# EAGLE board board (EAGLE 9.7.0)
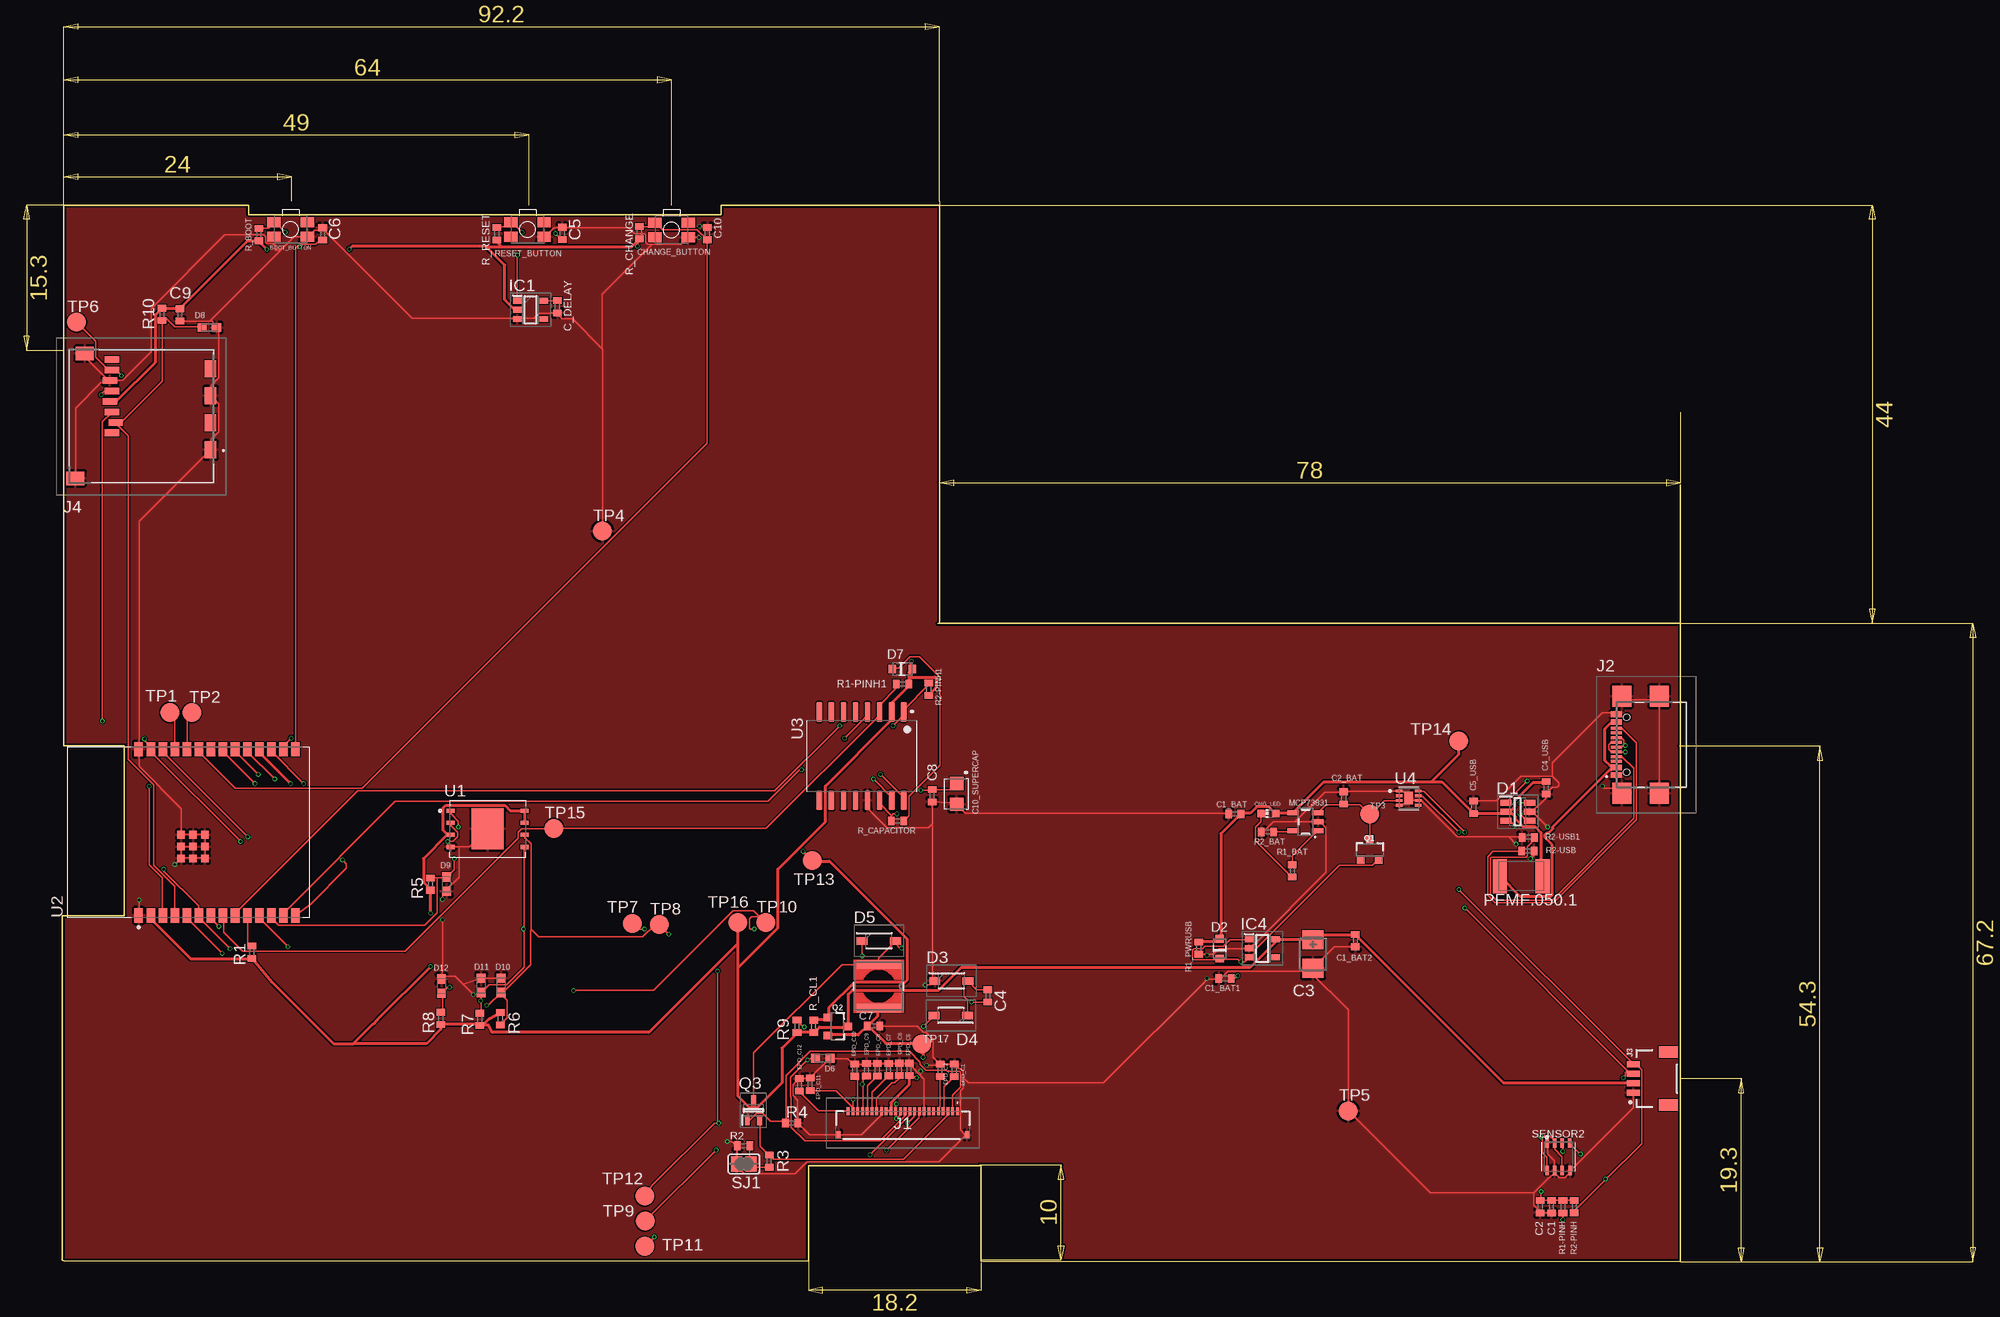
[diagram p0: board, top side]
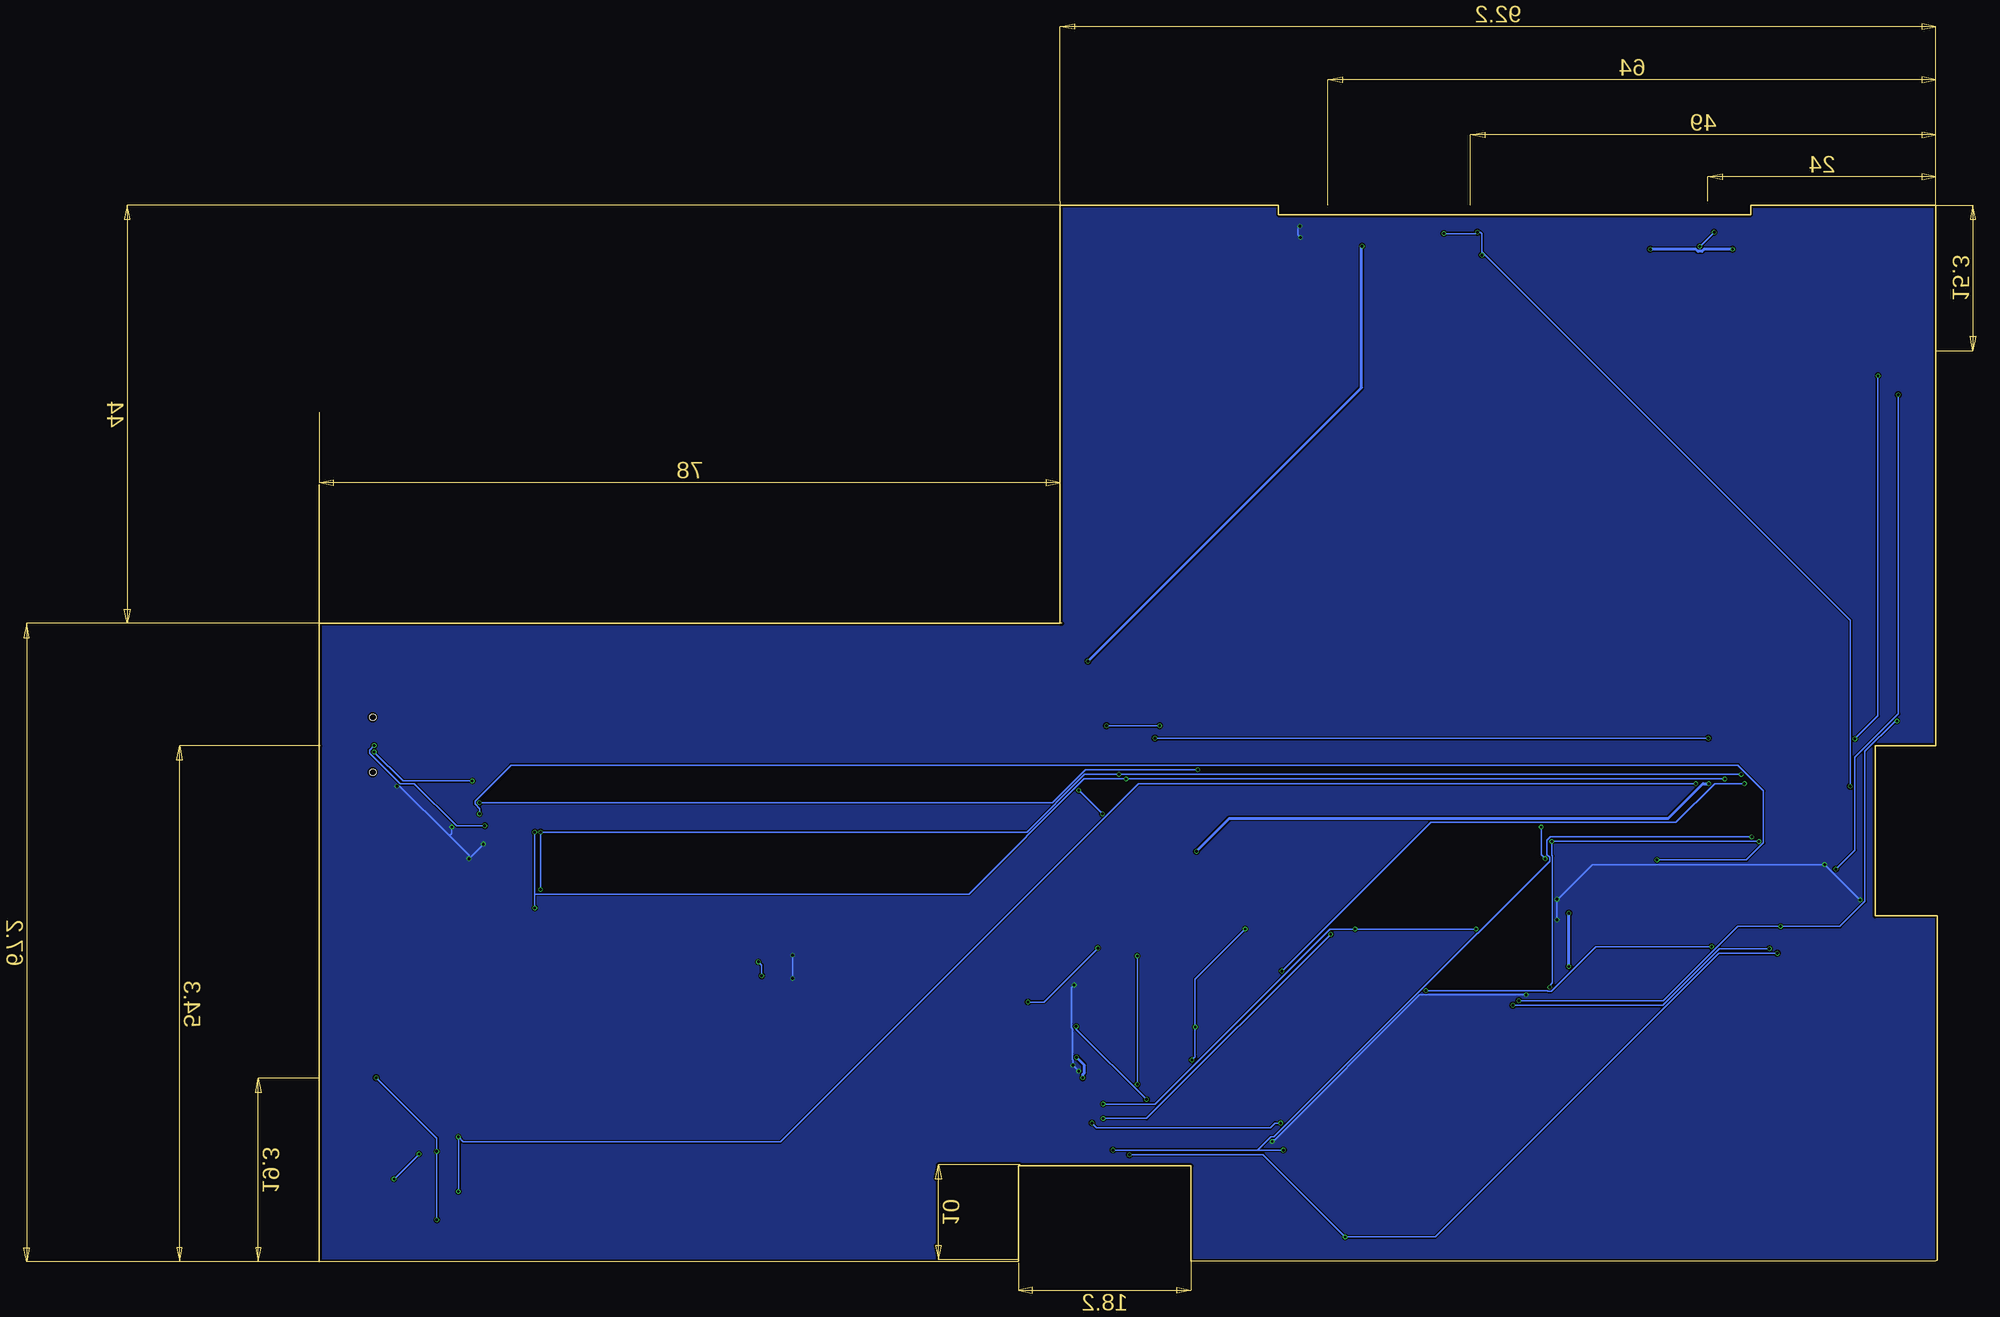
[diagram p1: board, bottom side, seen from below]

Size 170.34 x 111.2 mm. Coordinates in mm from the lower left corner, seen from the top.
Outline: 170.34,81.8 170.34,67.2
Outline: 170.34,67.2 92.34,67.2 92.34,111.2 69.34,111.2 69.34,110.2 19.64,110.2 19.64,111.2 0.14,111.2 0.14,54.3 6.54,54.3 6.54,36.4 0,36.4 0,0.14 0.14,0.1 78.55,0.05 78.55,10.1 96.74,10.1 96.74,0.04 170.34,0 170.34,67.2
Copper layers (1*16): Top 0.035mm / dielectric 1.6mm / Bottom 0.035mm
Design rules "jlcpcb-2layers.dru *": minimum track width 0.15mm, minimum drill 0.3mm, track to track 5mil, track to pad 5mil, pad to pad 5mil, via to via 5mil, smd to smd 5mil, copper to edge 0.2mm, drill to drill 6mil, minimum pad ring 10mil, minimum via ring 3mil, stop-mask expansion 4mil, vias tented up to drill 0mil, thermal gap 10mil
Net classes: 1 new_netclass: width 0.3 mm

## Footprints (pad centres in the part's own frame; a part is rotated, then mirrored left to right if it is on the bottom)
MYBUTTON = smd 1.4 x 1.05: 1 1.75,0.75; 2 -1.75,0.75; 3 -1.75,-0.75; 4 1.75,-0.75
EAGLE-LTSPICE_C0402 = smd 0.7 x 0.9: 1 -0.65,0; 2 0.65,0
ESP32_WROVER_EAGLE-LTSPICE_C0402 = smd 0.7 x 0.9: 1 -0.65,0; 2 0.65,0
RCL_CT3528 = smd 2 x 2.2: + -1.5,0; - 1.5,0
CAPCP3225X100N = smd 1.4 x 1.4: 1 -1.1,0; 2 1.1,0
ADAFRUIT_CHIP-LED0603 = smd 0.8 x 0.8: A 0,-0.75; C 0,0.75
SOT95P280X145-6N = smd 1.2 x 0.6: 1 -1.25,0.95; 2 -1.25,0; 3 -1.25,-0.95; 4 1.25,-0.95; 5 1.25,0; 6 1.25,0.95
ESP32_WROVER_AVX---SD0805S020S1R0_AVX_SD0805S020S1R0_0 = smd 0.8 x 0.9: 1 -1.05,0; 2 1.05,0
SOD3716X135N = smd 1.15 x 0.8: 1 -1.75,0; 2 1.75,0
DIOC1608X36N = smd 0.97 x 0.94: 1 -0.75,0; 2 0.75,0
SOT95P280X125-5N = smd 0.9 x 0.6: 1 -1.4,0.95; 2 -1.4,0; 3 -1.4,-0.95; 4 1.4,-0.95; 5 1.4,0.95
SOT95P280X120-5N = smd 0.9 x 0.6: 1 -1.4,0.95; 2 -1.4,0; 3 -1.4,-0.95; 4 1.4,-0.95; 5 1.4,0.95
FH34SRJ24S05SH99 = smd 0.3 x 0.8: 1 5.75,1.45; 2 5.25,1.45; 3 4.75,1.45; 4 4.25,1.45; 5 3.75,1.45; 6 3.25,1.45; 7 2.75,1.45; 8 2.25,1.45; 9 1.75,1.45; 10 1.25,1.45; 11 0.75,1.45; 12 0.25,1.45; 13 -0.25,1.45; 14 -0.75,1.45; 15 -1.25,1.45; 16 -1.75,1.45; 17 -2.25,1.45; 18 -2.75,1.45; 19 -3.25,1.45; 20 -3.75,1.45; 21 -4.25,1.45; 22 -4.75,1.45; 23 -5.25,1.45; 24 -5.75,1.45 | smd 0.4 x 0.8: MP1 6.75,-1.05; MP2 -6.75,-1.05
SAMACSYS_PARTS_USB4110GFA = smd 0.3 x 1.15: A1 -3.35,3.678; A4 -2.55,3.678; A5 -1.25,3.678; A6 -0.25,3.678; A7 0.25,3.678; A8 1.25,3.678; A9 2.55,3.678; A12 3.35,3.678; B1 3.05,3.678; B4 2.25,3.678; B5 1.75,3.678; B6 0.75,3.678; B7 -0.75,3.678; B8 -1.75,3.678; B9 -2.25,3.678; B12 -3.05,3.678 | smd 2.18 x 2: MP1 -5.11,-0.827; MP2 5.11,-0.827; MP3 -5.11,3.103; MP4 5.11,3.103 | hole 0.65: -2.89,2.603; 2.89,2.603
JST04_1MM_RA = smd 0.6 x 1.35: 1 -1.5,0; 2 -0.5,0; 3 0.5,0; 4 1.5,0 | smd 1.2 x 2: NC1 2.8,-3.675; NC2 -2.8,-3.675
112ATAARR03ATTEND = smd 1.8 x 1.2: G1 10.6,10.4; G2 4.9,10.4; S1 7.75,10.4; S2 2.05,10.4 | smd 1.4 x 1.9: G3 13.6,-3.85; G4 0.45,-2.85 | smd 0.7 x 1.5: P1 8.8,0; P2 7.7,0.4; P3 6.6,0; P4 5.5,-0.2; P5 4.4,0; P6 3.3,-0.2; P7 2.2,0; P8 1.1,0
IND_4828-WE-TPC_WRE = smd 0.889 x 4.699: 1 -2.286,0; 2 2.286,0
ESP32_WROVER_SPARKFUN-IC-POWER_SOT23-5 = smd 0.55 x 1.2: 1 -0.95,-1.3; 2 0,-1.3; 3 0.95,-1.3; 4 0.95,1.3; 5 -0.95,1.3
ESP32C6_VARISTOR_CT/CN1812 = smd 1.5 x 3.6: 1 -2.25,0; 2 2.25,0
ESP32_WROVER_SPARKFUN-DISCRETESEMI_SOT23-3 = smd 0.8 x 0.9: 1 -0.95,-1; 2 0.95,-1; 3 0,1.1
SOT65P210X110-3N = smd 1.05 x 0.5: 1 -1.05,0.65; 2 -1.05,-0.65; 3 1.05,0
ESP32_WROVER_EAGLE-LTSPICE_R0402 = smd 0.7 x 0.9: 1 -0.65,0; 2 0.65,0
ESP32_WROVER_BME680_PSON80P300X300X100-8N = smd 1.016 x 0.5: 1 1.458,1.2; 2 1.458,0.4; 3 1.458,-0.4; 4 1.458,-1.2; 5 -1.458,-1.22; 6 -1.458,-0.4; 7 -1.458,0.4; 8 -1.458,1.2
SJ = smd 1.168 x 1.6: 1 -0.762,0; 2 0.762,0
TP20R = smd 2 x 2: TP 0,0
SON127P600X800X80-9N = smd 0.94 x 0.44: 1 -3.895,1.905; 2 -3.895,0.635; 3 -3.895,-0.635; 4 -3.895,-1.905; 5 3.895,-1.905; 6 3.895,-0.635; 7 3.895,0.635; 8 3.895,1.905 | smd 3.4 x 4.3: 9 0,0
XCVR_ESP32-C6-WROOM-1-N8 = smd 1.5 x 0.9: 1 -8.75,5.26; 2 -8.75,3.99; 3 -8.75,2.72; 4 -8.75,1.45; 5 -8.75,0.18; 6 -8.75,-1.09; 7 -8.75,-2.36; 8 -8.75,-3.63; 9 -8.75,-4.9; 10 -8.75,-6.17; 11 -8.75,-7.44; 12 -8.75,-8.71; 13 -8.75,-9.98; 14 -8.75,-11.25; 15 8.75,-11.25; 16 8.75,-9.98; 17 8.75,-8.71; 18 8.75,-7.44; 19 8.75,-6.17; 20 8.75,-4.9; 21 8.75,-3.63; 22 8.75,-2.36; 23 8.75,-1.09; 24 8.75,0.18; 25 8.75,1.45; 26 8.75,2.72; 27 8.75,3.99; 28 8.75,5.26 | smd 0.8 x 0.8: 29_1 -2.755,0.79; 29_2 -1.505,0.79; 29_3 -0.255,0.79; 29_4 -2.755,-0.46; 29_5 -1.505,-0.46; 29_6 -0.255,-0.46; 29_7 -2.755,-1.71; 29_8 -1.505,-1.71; 29_9 -0.255,-1.71
SOIC127P1032X265-16N = smd 2.05 x 0.59: 1 -4.655,4.445; 2 -4.655,3.175; 3 -4.655,1.905; 4 -4.655,0.635; 5 -4.655,-0.635; 6 -4.655,-1.905; 7 -4.655,-3.175; 8 -4.655,-4.445; 9 4.655,-4.445; 10 4.655,-3.175; 11 4.655,-1.905; 12 4.655,-0.635; 13 4.655,0.635; 14 4.655,1.905; 15 4.655,3.175; 16 4.655,4.445
SON50P200X200X80-9N = smd 0.765 x 0.27: 1 -0.985,0.75; 2 -0.985,0.25; 3 -0.985,-0.25; 4 -0.985,-0.75; 6 0.985,-0.25 | smd 0.76 x 0.27: 5 0.985,-0.75; 7 0.985,0.25; 8 0.985,0.75 | smd 0.9 x 1.3: 9 0,0

## Placement (x,y rotation side)
BOOT_BUTTON  BUTTON_CUSYOMV1  [MYBUTTON]  24.04,108.65 180 top
C1  100nF  [EAGLE-LTSPICE_C0402]  156.77,5.78 270 top
C1_BAT  4.7uF  [EAGLE-LTSPICE_C0402]  123.43,47.15 180 top
C1_BAT1  4.7uF  [ESP32_WROVER_EAGLE-LTSPICE_C0402]  122.39,29.81 180 top
C1_BAT2  4.7uF  [ESP32_WROVER_EAGLE-LTSPICE_C0402]  136.13,33.81 270 top
C2  100nF  [EAGLE-LTSPICE_C0402]  155.57,5.8 270 top
C2_BAT  4.7uF  [EAGLE-LTSPICE_C0402]  134.89,48.82 90 top
C3  100uF TANT  [RCL_CT3528]  131.68,32.39 270 top
C4  4.7uF/25V  [EAGLE-LTSPICE_C0402]  97.45,27.98 270 top
C4_USB  100nF  [EAGLE-LTSPICE_C0402]  156.21,49.88 270 top
C5  1uF  [EAGLE-LTSPICE_C0402]  52.63,108.23 90 top
C5_USB  4.7uF  [EAGLE-LTSPICE_C0402]  148.57,47.83 90 top
C6  100nF  [EAGLE-LTSPICE_C0402]  27.41,108.18 90 top
C7  10uF  [EAGLE-LTSPICE_C0402]  85.41,24.83 0 top
C8  100nF  [EAGLE-LTSPICE_C0402]  91.57,49.04 270 top
C9  100nF  [ESP32_WROVER_EAGLE-LTSPICE_C0402]  12.37,99.66 270 top
C10  100nF  [EAGLE-LTSPICE_C0402]  67.91,108.22 90 top
C10_SUPERCAP  CPH3225A  [CAPCP3225X100N]  94.15,49.25 270 top
C_DELAY  100nF  [EAGLE-LTSPICE_C0402]  52.13,100.51 270 top
CHANGE_BUTTON  BUTTON_CUSYOMV1  [MYBUTTON]  64.14,108.6 180 top
CHG_LED  [ADAFRUIT_CHIP-LED0603]  126.99,47.19 90 top
D1  USBLC6-2SC6Y  [SOT95P280X145-6N]  153.22,47.37 0 top
D2  ESP32_WROVER_AVX---SD0805S020S1R0_AVX_SD0805S020S1R0_0_0AVX_SD0805S020S1R0_0_0  [ESP32_WROVER_AVX---SD0805S020S1R0_AVX_SD0805S020S1R0_0]  121.86,32.95 90 top
D3  MBR0530  [SOD3716X135N]  93.6,29.57 0 top
D4  MBR0530  [SOD3716X135N]  93.54,25.93 180 top
D5  MBR0530  [SOD3716X135N]  85.96,33.78 0 top
D6  PGB1010603MR  [DIOC1608X36N]  80.06,21.43 180 top
D7  ESP32_WROVER_AVX---SD0805S020S1R0_AVX_SD0805S020S1R0_0_0AVX_SD0805S020S1R0_0_0  [ESP32_WROVER_AVX---SD0805S020S1R0_AVX_SD0805S020S1R0_0]  88.44,62.38 0 top
D8  PGB1010603MR  [DIOC1608X36N]  15.48,98.33 180 top
D9  PGB1010603MR  [DIOC1608X36N]  40.47,39.74 90 top
D10  PGB1010603MR  [DIOC1608X36N]  46.21,29.08 270 top
D11  PGB1010603MR  [DIOC1608X36N]  44.11,29.1 270 top
D12  PGB1010603MR  [DIOC1608X36N]  39.91,29.02 270 top
EPD_C1  1uF/50V  [EAGLE-LTSPICE_C0402]  93.91,20.16 270 top
EPD_C2  1uF/50V  [EAGLE-LTSPICE_C0402]  92.41,20.15 270 top
EPD_C5  0.1uF/50V  [EAGLE-LTSPICE_C0402]  89.15,20.24 270 top
EPD_C6  1uF/50V  [EAGLE-LTSPICE_C0402]  88.12,20.24 270 top
EPD_C7  1uF/50V  [EAGLE-LTSPICE_C0402]  86.99,20.22 270 top
EPD_C8  1uF/50V  [EAGLE-LTSPICE_C0402]  85.79,20.21 270 top
EPD_C9  1uF/50V  [EAGLE-LTSPICE_C0402]  84.66,20.2 270 top
EPD_C10  1uF/50V  [EAGLE-LTSPICE_C0402]  83.43,20.17 270 top
EPD_C11  1uF/50V  [EAGLE-LTSPICE_C0402]  78.73,18.69 270 top
EPD_C12  1uF/50V  [EAGLE-LTSPICE_C0402]  77.6,18.63 270 top
IC1  BD5229G-TR  [SOT95P280X125-5N]  49.29,100.19 0 top
IC4  XC6220A331MR-G  [SOT95P280X120-5N]  126.33,32.99 0 top
J1  FH34SRJ-24S-0.5SH_99_  [FH34SRJ24S05SH99]  88.48,14.39 0 top
J2  [SAMACSYS_PARTS_USB4110GFA]  167.29,54.42 90 top
J3  QWIIC_RIGHT_ANGLE  [JST04_1MM_RA]  165.39,19.28 90 top
J4  112A-TAAR-R03_ATTEND  [112ATAARR03ATTEND]  5.22,96.05 270 top
L1  68uH  [IND_4828-WE-TPC_WRE]  85.94,29 270 top
MCP73831  ESP32_WROVER_SPARKFUN-IC-POWER_MCP73831  [ESP32_WROVER_SPARKFUN-IC-POWER_SOT23-5]  130.88,46.31 90 top
PFMF.050.1  [ESP32C6_VARISTOR_CT/CN1812]  153.58,40.59 0 top
Q1  20V/4.2A/52mΩ/1.4W  [ESP32_WROVER_SPARKFUN-DISCRETESEMI_SOT23-3]  137.65,43.36 0 top
Q2  20V/4.2A/52mΩ/1.4W  [ESP32_WROVER_SPARKFUN-DISCRETESEMI_SOT23-3]  81.6,24.77 270 top
Q3  SI1308EDL-T1-GE3  [SOT65P210X110-3N]  72.76,15.95 90 top
R1  10K  [ESP32_WROVER_EAGLE-LTSPICE_R0402]  19.97,32.57 270 top
R1-PINH  10K  [ESP32_WROVER_EAGLE-LTSPICE_R0402]  157.97,5.8 90 top
R1-PINH1  10K  [ESP32_WROVER_EAGLE-LTSPICE_R0402]  88.45,60.79 0 top
R1_BAT  200  [ESP32_WROVER_EAGLE-LTSPICE_R0402]  129.49,41.13 90 top
R1_PWRUSB  100K  [ESP32_WROVER_EAGLE-LTSPICE_R0402]  119.63,33.01 90 top
R2  2.2  [ESP32_WROVER_EAGLE-LTSPICE_R0402]  71.71,12.21 0 top
R2-PINH  10K  [ESP32_WROVER_EAGLE-LTSPICE_R0402]  159.17,5.81 90 top
R2-PINH1  10K  [ESP32_WROVER_EAGLE-LTSPICE_R0402]  91.23,60.25 270 top
R2-USB  5k1  [ESP32_WROVER_EAGLE-LTSPICE_R0402]  154.29,43.25 0 top
R2-USB1  5k1  [ESP32_WROVER_EAGLE-LTSPICE_R0402]  154.32,44.67 0 top
R2_BAT  2K  [ESP32_WROVER_EAGLE-LTSPICE_R0402]  126.88,45.25 0 top
R3  0.47  [ESP32_WROVER_EAGLE-LTSPICE_R0402]  74.41,10.59 90 top
R4  10k  [ESP32_WROVER_EAGLE-LTSPICE_R0402]  76.79,14.59 180 top
R5  10K  [ESP32_WROVER_EAGLE-LTSPICE_R0402]  38.77,39.75 270 top
R6  10K  [ESP32_WROVER_EAGLE-LTSPICE_R0402]  46.11,25.57 90 top
R7  10K  [ESP32_WROVER_EAGLE-LTSPICE_R0402]  43.97,25.51 270 top
R8  10K  [ESP32_WROVER_EAGLE-LTSPICE_R0402]  39.85,25.61 270 top
R9  10K  [ESP32_WROVER_EAGLE-LTSPICE_R0402]  77.35,24.79 270 top
R10  10K  [ESP32_WROVER_EAGLE-LTSPICE_R0402]  10.51,99.71 90 top
R_BOOT  10K  [ESP32_WROVER_EAGLE-LTSPICE_R0402]  20.71,108.11 270 top
R_CAPACITOR  15  [ESP32_WROVER_EAGLE-LTSPICE_R0402]  87.93,46.39 180 top
R_CHANGE  10K  [ESP32_WROVER_EAGLE-LTSPICE_R0402]  60.75,108.32 270 top
R_CL1  10K  [ESP32_WROVER_EAGLE-LTSPICE_R0402]  79.09,24.77 270 top
R_RESET  10K  [ESP32_WROVER_EAGLE-LTSPICE_R0402]  45.75,108.2 270 top
RESET_BUTTON  BUTTON_CUSYOMV1  [MYBUTTON]  48.98,108.65 180 top
SENSOR2  ESP32_WROVER_BME680_BME680  [ESP32_WROVER_BME680_PSON80P300X300X100-8N]  157.5,11.05 90 top
SJ1  [SJ]  71.76,10.29 0 top
TP1  TPTP20R  [TP20R]  11.33,57.81 0 top
TP2  TPTP20R  [TP20R]  13.63,57.79 0 top
TP3  TPTP20R  [TP20R]  137.65,47.12 0 top
TP4  TPTP20R  [TP20R]  56.87,76.89 0 top
TP5  TPTP20R  [TP20R]  135.39,15.89 0 top
TP6  TPTP20R  [TP20R]  1.51,98.89 0 top
TP7  TPTP20R  [TP20R]  60.03,35.59 0 top
TP8  TPTP20R  [TP20R]  62.85,35.49 0 top
TP9  TPTP20R  [TP20R]  61.37,4.29 0 top
TP10  TPTP20R  [TP20R]  74.06,35.71 0 top
TP11  TPTP20R  [TP20R]  61.31,1.63 0 top
TP12  TPTP20R  [TP20R]  61.31,6.91 0 top
TP13  TPTP20R  [TP20R]  78.96,42.21 0 top
TP14  TPTP20R  [TP20R]  147.01,54.81 0 top
TP15  TPTP20R  [TP20R]  51.76,45.61 0 top
TP16  TPTP20R  [TP20R]  71.11,35.71 0 top
TP17  TPTP20R  [TP20R]  90.46,22.91 0 top
U1  W25Q512JVEIQ  [SON127P600X800X80-9N]  44.78,45.56 0 top
U2  ESP32-C6-WROOM-1-N8  [XCVR_ESP32-C6-WROOM-1-N8]  13.3,45.2 90 top
U3  DS3231SN#  [SOIC127P1032X265-16N]  84.14,53.21 270 top
U4  MAX17048G+T10  [SON50P200X200X80-9N]  141.74,48.8 0 top

## Library data of the parts
BOOT_BUTTON CHANGE_BUTTON CHG_LED PFMF.050.1 RESET_BUTTON SJ1 TP1-TP17 = DeskAssistant v19 v1
C1 C1_BAT C1_BAT1 C1_BAT2 C2 C2_BAT C4 C4_USB C5 C5_USB C6-C10 C_DELAY EPD_C1 EPD_C2 EPD_C5-EPD_C12 = DeskAssistant v19 v1; SPICEMODEL: NONE; SPICEPREFIX: C
C3 = DeskAssistant v19 v1; SPICEPREFIX: C
C10_SUPERCAP = DeskAssistant v19 v1; AVAILABILITY: Not in stock; CHECK_PRICES: https://www.snapeda.com/parts/CPH3225A/Seiko+Instruments/view-part/?ref=eda; DESCRIPTION: 11 mF (EDLC) Supercapacitor 3.3 V 1210 (3225 Metric) - -; MF: Seiko Instruments; MP: CPH3225A; PACKAGE: 1210 Seiko; PRICE: None; PURCHASE-URL: https://www.snapeda.com/api/url_track_click_mouser/?unipart_id=562593&manufacturer=Seiko Instruments&part_name=CPH3225A&search_term=None; SNAPEDA_LINK: https://www.snapeda.com/parts/CPH3225A/Seiko+Instruments/view-part/?ref=snap
D1 = DeskAssistant v19 v1; AVAILABILITY: In Stock; CHECK_PRICES: https://www.snapeda.com/parts/USBLC6-2SC6Y/STMicroelectronics/view-part/?ref=eda; DESCRIPTION: 17V Clamp 5A (8/20µs) Ipp Tvs Diode Surface Mount SOT-23-6; MF: STMicroelectronics; MP: USBLC6-2SC6Y; PACKAGE: SOT-23-6 STMicroelectronics; PRICE: None; SNAPEDA_LINK: https://www.snapeda.com/parts/USBLC6-2SC6Y/STMicroelectronics/view-part/?ref=snap
D2 D7 = DeskAssistant v19 v1; CENTROID_NOT_SPECIFIED: No; DATASHEET: http://datasheets.avx.com/schottky.pdf; DIGIKEY_DESCRIPTION: DIODE SCHOTTKY 20V 1A 0805; DIGIKEY_PART_NUMBER: 478-7800-1-ND; LEAD_FREE: yes; MF: AVX; MOUSER_PART_NUMBER: 581-SD0805S020S1R0; PACKAGE: 0805 (2012 metric); PREFIX: D; ROHS: yes; TEMPERATURE_RANGE_HIGH: +125°C; TEMPERATURE_RANGE_LOW: -55°C
D3-D5 = DeskAssistant v19 v1; AVAILABILITY: In Stock; CHECK_PRICES: https://www.snapeda.com/parts/MBR0530/Onsemi/view-part/?ref=eda; DESCRIPTION: Diode Schottky 30 V 500mA Surface Mount SOD-123; MF: ON Semiconductor; MP: MBR0530; PACKAGE: SOD-123-2 ON Semiconductor; PRICE: None; PURCHASE-URL: https://www.snapeda.com/api/url_track_click_mouser/?unipart_id=179458&manufacturer=ON Semiconductor&part_name=MBR0530&search_term=None; SNAPEDA_LINK: https://www.snapeda.com/parts/MBR0530/Onsemi/view-part/?ref=snap
D6 D8-D12 = DeskAssistant v19 v1; AVAILABILITY: In Stock; CHECK_PRICES: https://www.snapeda.com/parts/PGB1010603MR/Littelfuse/view-part/?ref=eda; DESCRIPTION: 150V (Typ) Clamp - Ipp Tvs Diode Surface Mount 0603 (1608 Metric); MF: Littelfuse Inc.; MP: PGB1010603MR; PACKAGE: 0603 Littelfuse Inc.; PRICE: None; PURCHASE-URL: https://www.snapeda.com/api/url_track_click_mouser/?unipart_id=5659453&manufacturer=Littelfuse Inc.&part_name=PGB1010603MR&search_term=None; SNAPEDA_LINK: https://www.snapeda.com/parts/PGB1010603MR/Littelfuse/view-part/?ref=snap
IC1 = DeskAssistant v19 v1; DESCRIPTION: Voltage Detector with Adjustable Delay Time: CMOS processes are utilized to develop high precision, low current consumption CMOS reset ICs that allow arbitrary setting of the delay time. The extensive lineup includes both Nch Open Drain and CMOS output types in a wide range of detection voltages (from 2.3V to 6.0V, in 0.1V steps), enabling selection of the ideal solution based on customer requirements. In addition, the entire series is of course both lead-free and RoHS-compliant.; HEIGHT: 1.25mm; MANUFACTURER_NAME: ROHM Semiconductor; MANUFACTURER_PART_NUMBER: BD5229G-TR; MOUSER_PART_NUMBER: 755-BD5229G-TR; MOUSER_PRICE-STOCK: https://www.mouser.co.uk/ProductDetail/ROHM-Semiconductor/BD5229G-TR?qs=4kLU8WoGk0vvnhrrYwdszw%3D%3D
IC4 = DeskAssistant v19 v1; DESCRIPTION: LDO Voltage Regulators; HEIGHT: 1.2mm; MANUFACTURER_NAME: Torex; MANUFACTURER_PART_NUMBER: XC6220A331MR-G; MOUSER_PART_NUMBER: 865-XC6220A331MR-G; MOUSER_PRICE-STOCK: https://www.mouser.co.uk/ProductDetail/Torex-Semiconductor/XC6220A331MR-G?qs=AsjdqWjXhJ8ZSWznL1J0gg%3D%3D
J1 = DeskAssistant v19 v1; DESCRIPTION: 24 Position FFC, FPC Connector Contacts, Top and Bottom 0.020" (0.50mm) Surface Mount, Right Angle; HEIGHT: 1.1mm; MANUFACTURER_NAME: Hirose; MANUFACTURER_PART_NUMBER: FH34SRJ-24S-0.5SH(99); MOUSER_PART_NUMBER: 798-FH34SRJ24S05SH99; MOUSER_PRICE-STOCK: https://www.mouser.co.uk/ProductDetail/Hirose-Connector/FH34SRJ-24S-0.5SH99?qs=vcbW%252B4%252BSTIpKBl5ap9J8Fw%3D%3D
J2 = DeskAssistant v19 v1; DESCRIPTION: CONN USB 2.0 TYPE-C R/A SMT; HEIGHT: 3.26mm; MANUFACTURER_NAME: GCT (GLOBAL CONNECTOR TECHNOLOGY); MANUFACTURER_PART_NUMBER: USB4110-GF-A; MOUSER_PART_NUMBER: 640-USB4110-GF-A; MOUSER_PRICE-STOCK: https://www.mouser.co.uk/ProductDetail/GCT/USB4110-GF-A?qs=KUoIvG%2F9IlYiZvIXQjyJeA%3D%3D
J3 = DeskAssistant v19 v1; PROD_ID: CONN-13694
J4 = DeskAssistant v19 v1; DESCRIPTION: Micro SD Card Socket, Push-Push Type, Top Mount, SMT, H=1.83mm, 10u; HEIGHT: 1.9mm; MANUFACTURER_NAME: ATTEND; MANUFACTURER_PART_NUMBER: 112A-TAAR-R03 ATTEND
L1 = DeskAssistant v19 v1; COPYRIGHT: Copyright (C) 2024 Ultra Librarian. All rights reserved.; MANUFACTURER_PART_NUMBER: 744043680; MFR_NAME: Wurth Electronics
MCP73831 = DeskAssistant v19 v1; PROD_ID: IC-09995
Q1 Q2 = DeskAssistant v19 v1; PROD_ID: TRAN-14388
Q3 = DeskAssistant v19 v1; AVAILABILITY: In Stock; CHECK_PRICES: https://www.snapeda.com/parts/SI1308EDL-T1-GE3/Vishay+Siliconix/view-part/?ref=eda; DESCRIPTION: Si1308EDL-T1-GE3 N-channel MOSFET Transistor, 1.5 A, 30 V, 3-Pin SC-70 | Siliconix / Vishay SI1308EDL-T1-GE3; MF: Vishay Siliconix; MP: SI1308EDL-T1-GE3; PACKAGE: SOT-323 Vishay Semiconductor; PRICE: None; PURCHASE-URL: https://www.snapeda.com/api/url_track_click_mouser/?unipart_id=274603&manufacturer=Vishay Siliconix&part_name=SI1308EDL-T1-GE3&search_term=None; SNAPEDA_LINK: https://www.snapeda.com/parts/SI1308EDL-T1-GE3/Vishay+Siliconix/view-part/?ref=snap
R1 R1-PINH R1-PINH1 R1_BAT R2 R2-PINH R2-PINH1 R2-USB R2-USB1 R2_BAT R3-R10 R_BOOT R_CAPACITOR R_CHANGE R_CL1 R_RESET = DeskAssistant v19 v1; SPICEMODEL: NONE; SPICEPREFIX: R
R1_PWRUSB = DeskAssistant v19 v1; SPICEPREFIX: R
SENSOR2 = DeskAssistant v19 v1; AVAILABILITY: Unavailable; DESCRIPTION: Integrated Environmental Unit; MF: Bosch Sensortec; MP: BME680; PACKAGE: LGA-8 Bosch Tools; PRICE: None
U1 = DeskAssistant v19 v1; AVAILABILITY: In Stock; CHECK_PRICES: https://www.snapeda.com/parts/W25Q512JVEIQ/Winbond+Electronics/view-part/?ref=eda; DESCRIPTION: FLASH - NOR Memory IC 512Mb (64M x 8) SPI - Quad I/O 133 MHz 8-WSON (8x6); MF: Winbond Electronics; MP: W25Q512JVEIQ; PACKAGE: Package; PRICE: None; SNAPEDA_LINK: https://www.snapeda.com/parts/W25Q512JVEIQ/Winbond+Electronics/view-part/?ref=snap
U2 = DeskAssistant v19 v1; AVAILABILITY: In Stock; CHECK_PRICES: https://www.snapeda.com/parts/ESP32-C6-WROOM-1-N8/Espressif+Systems/view-part/?ref=eda; DESCRIPTION: Multiprotocol Modules ESP32-C6 module, Wi-Fi 6 in 2.4 GHz band, Bluetooth 5, Zigbee 3.0 and Thread. ESP34-WROOM Compatible - ENGINEERING SAMPLE; MF: Espressif Systems; MP: ESP32-C6-WROOM-1-N8; PACKAGE: None; PRICE: None; SNAPEDA_LINK: https://www.snapeda.com/parts/ESP32-C6-WROOM-1-N8/Espressif+Systems/view-part/?ref=snap
U3 = DeskAssistant v19 v1; AVAILABILITY: In Stock; CHECK_PRICES: https://www.snapeda.com/parts/DS3231SN%23/Analog+Devices/view-part/?ref=eda; DESCRIPTION: Extremely Accurate I²C-Integrated RTC/TCXO/Crystal; MF: Analog Devices; MP: DS3231SN#; PACKAGE: SOIC-16 Maxim; PRICE: None; PURCHASE-URL: https://www.snapeda.com/api/url_track_click_mouser/?unipart_id=99048&manufacturer=Analog Devices&part_name=DS3231SN#&search_term=None; SNAPEDA_LINK: https://www.snapeda.com/parts/DS3231SN%23/Analog+Devices/view-part/?ref=snap
U4 = DeskAssistant v19 v1; AVAILABILITY: In Stock; CHECK_PRICES: https://www.snapeda.com/parts/MAX17048G+T10/Analog+Devices/view-part/?ref=eda; DESCRIPTION: 3µA 1-Cell/2-Cell Fuel Gauge with ModelGauge; MF: Analog Devices; MP: MAX17048G+T10; PACKAGE: TDFN-8 Maxim; PRICE: None; PURCHASE-URL: https://www.snapeda.com/api/url_track_click_mouser/?unipart_id=329239&manufacturer=Analog Devices&part_name=MAX17048G+T10&search_term=None; SNAPEDA_LINK: https://www.snapeda.com/parts/MAX17048G+T10/Analog+Devices/view-part/?ref=snap

## Nets
3V3 [new_netclass]: C1_BAT2.1 C3.+ C9.1 D7.2 IC1.2 IC4.5 J3.2 J4.P4 Q2.3 R1-PINH1.2 R1.2 R2-PINH1.2 R5.2 R6.2 R7.2 R8.2 R9.2 R10.2 R_BOOT.2 R_CHANGE.2 R_CL1.2 R_RESET.2 TP16.TP U1.3 U1.7 U1.8 U2.2 U3.2
32KHZ: R2-PINH1.1 U2.9 U3.1
DN: D1.1 J2.A7 J2.B7
DP: D1.3 J2.A6 J2.B6
EPD_3V3 [new_netclass]: C7.1 EPD_C5.2 J1.15 J1.16 L1.2 Q2.2 TP17.TP
EPD_3V3_C [new_netclass]: Q2.1 R_CL1.1 TP13.TP U2.18
EPD_BUSY: J1.9 TP9.TP U2.26
EPD_CS: D6.2 J1.12 R9.1 TP10.TP U2.11
EPD_DC: J1.11 TP11.TP U2.5
EPD_RST: J1.10 TP12.TP U2.21
FLASH_CS: D9.2 R5.1 U1.1 U2.12
GDR: J1.2 Q3.1 R4.2
GND: BOOT_BUTTON.2 C1.2 C1_BAT1.2 C1_BAT2.2 C1_BAT.2 C2.2 C2_BAT.2 C3.- C4_USB.2 C5.2 C5_USB.2 C6.2 C7.2 C8.2 C9.2 C10.2 C10_SUPERCAP.2 C_DELAY.2 CHANGE_BUTTON.2 D1.5 D3.1 D6.1 D8.1 D9.1 D10.1 D11.1 D12.1 EPD_C1.1 EPD_C2.1 EPD_C5.1 EPD_C6.1 EPD_C7.1 EPD_C8.1 EPD_C9.1 EPD_C10.1 EPD_C11.1 EPD_C12.1 IC1.3 IC4.2 J1.8 J1.17 J1.MP1 J1.MP2 J2.A1 J2.A12 J2.B1 J2.B12 J2.MP1 J2.MP2 J2.MP3 J2.MP4 J3.1 J4.G1 J4.G2 J4.G3 J4.G4 J4.P6 MCP73831.2 R1_PWRUSB.1 R2-USB1.1 R2-USB.2 R2.1 R2_BAT.1 R4.1 RESET_BUTTON.2 SENSOR2.1 SENSOR2.5 SENSOR2.7 SJ1.1 TP4.TP TP5.TP U1.4 U1.9 U2.1 U2.28 U2.29_1 U2.29_2 U2.29_3 U2.29_4 U2.29_5 U2.29_6 U2.29_7 U2.29_8 U2.29_9 U3.13 U4.1 U4.4 U4.6 U4.9
GPIO8: R1.1 U2.10
I2C_PW: C1.1 C2.1 R1-PINH.2 R2-PINH.2 SENSOR2.2 SENSOR2.6 SENSOR2.8 U2.17
INT_RTC: R1-PINH1.1 TP15.TP U2.8 U3.3
IO/BOOT: BOOT_BUTTON.4 C6.1 R_BOOT.1 U2.15
IO/CHANGE: C10.1 CHANGE_BUTTON.4 R_CHANGE.1 U2.23
MISO: D12.2 J4.P7 R8.1 TP6.TP U1.2 U2.27
MOSI: D11.2 J1.14 J4.P3 R7.1 TP7.TP U1.5 U2.7
N$1: J2.A5 R2-USB1.2
N$4: J2.B5 R2-USB.1
N$6: C1_BAT1.1 D2.1 IC4.1 IC4.3 Q1.2
N$7: MCP73831.5 R2_BAT.2
N$8: EPD_C2.2 J1.5
N$9: EPD_C1.2 J1.4
N$10: CHG_LED.C R1_BAT.1
N$11: MCP73831.1 R1_BAT.2
N$12: EPD_C12.2 J1.24
N$13: C_DELAY.1 IC1.5
N$15: EPD_C10.2 J1.22
N$16: C4.1 D3.2 D4.1
N$18: EPD_C8.2 J1.20
N$19: EPD_C7.2 J1.19
N$20: EPD_C6.2 J1.18
N$25: D7.1 R_CAPACITOR.1
PREVGH: D5.1 EPD_C9.2 J1.21
PREVGL: D4.2 EPD_C11.2 J1.23
RESE: J1.3 Q3.2 R3.2
RESE': R2.2 R3.1 SJ1.2
RESET: C5.1 IC1.1 R_RESET.1 RESET_BUTTON.4 U2.3
RTC_RST: U2.16 U3.4
RX: TP2.TP U2.24
SCK: D10.2 J1.13 J4.P5 R6.1 TP8.TP U1.6 U2.6
SCL: J3.4 R2-PINH.1 SENSOR2.4 U2.20 U3.16 U4.7
SDA: J3.3 R1-PINH.1 SENSOR2.3 U2.19 U3.15 U4.8
SRC: C4.2 D5.2 L1.1 Q3.3
SS_SD: D8.2 J4.P2 R10.1 U2.4
TX: TP1.TP U2.25
USB_D+: D1.4 U2.14
USB_D-: D1.6 U2.13
VBAT: C2_BAT.1 MCP73831.3 Q1.3 TP3.TP U4.2 U4.3
VBUS [new_netclass]: C1_BAT.1 C4_USB.1 C5_USB.1 CHG_LED.A D1.2 D2.2 MCP73831.4 PFMF.050.1.2 R1_PWRUSB.2 TP14.TP
VRTC: C8.1 C10_SUPERCAP.1 R_CAPACITOR.2 U3.14
VUSB [new_netclass]: J2.A4 J2.A9 J2.B4 J2.B9 PFMF.050.1.1

## Tracks (layer width: path | path; a pad name or v marks a point on that pad's centre or on a via)
3V3  (via drill 0.3)
  Top 0.3: IC1.2 47.86,100.26 47.58,100.26 46.58,101.26 46.58,104.91 44.63,106.85 | J4.P4 5.06,90.56 5.68,90.56 9.77,94.65 9.77,99.63 10.39,100.26 R10.2 10.53,100.33 12.33,100.33 C9.1 12.47,100.39 19.53,107.46 R_BOOT.2 20.78,107.32 v21.54,106.56 | U1.7 48.69,46.24 48.69,47.42 U1.8 48.55,47.49 47.16,47.49 46.61,48.04 40.38,48.04 40.1,47.76 40.1,45.41 40.45,45.06 U1.3 40.86,44.92 40.52,44.92 38.02,42.43 38.02,39.94 38.71,39.25 38.71,39.11 R5.2 38.78,38.97 v38.78,36.68 | 44.28,24.91 44.88,24.91 45.26,24.15 61.78,24.15 71.12,33.5 | 44.28,24.91 43.99,24.91 R7.2 43.85,24.98 39.9,24.98 R8.2 39.85,24.46 38.34,22.95 30.64,22.95 | 44.28,24.91 44.95,25.59 R6.2 | U2.2 9.35,36.41 9.35,36.06 13.51,31.91 19.93,31.91 R1.2 22.11,29.39 28.56,22.95 30.64,22.95 | 33.16,25.45 33.18,25.45 | 33.16,25.45 32.76,25.05 32.74,25.05 30.64,22.95 | 33.16,25.45 v38.78,31.07 | J3.2 165.37,18.82 151.73,18.82 136.22,34.33 C1_BAT2.1 136.08,34.4 132.2,34.4 131.79,33.98 C3.+ 131.65,33.91 127.77,33.91 IC4.5 127.7,33.78 127.7,33.64 125.07,31 94.67,31 92.24,28.58 83.17,28.58 82.76,28.17 82.76,24.91 Q2.3 82.69,24.7 79.71,24.7 79.23,24.22 R_CL1.2 79.09,24.15 R9.2 77.29,24.01 75.76,22.49 75.76,18.82 73.13,16.19 72.37,16.19 71.12,17.43 71.12,30.94 | 89.13,61.55 89.13,62.03 89.47,62.38 D7.2 89.41,62.51 v89.41,63.21 | 89.13,61.55 89.13,60.85 R1-PINH1.2 89.13,60.64 87.33,58.84 87.33,57.88 U3.2 87.26,57.74 87.26,56.97 80.33,50.05 80.33,46.31 75.35,41.32 75.35,35.16 71.12,30.94 | 89.13,61.55 91.83,61.55 91.97,61.41 91.97,60.44 91.27,59.74 91.27,59.61 R2-PINH1.2 | 71.12,30.94 71.12,33.5
  Top 0.3: 71.12,33.5 71.12,35.64 TP16.TP | v30.2,106.56 30.5,106.86 44.63,106.86 44.63,106.85 | 44.63,106.85 46.24,106.85 | 46.24,106.85 59.94,106.85 60.55,107.47 | 60.55,107.47 R_CHANGE.2 | R_RESET.2 45.54,107.55 46.24,106.85 | v60.55,106.88 60.55,107.47
  Bottom 0.3: v38.78,31.07 v38.78,36.68 | v89.41,63.21 60.6,92.02 60.6,106.88 v60.55,106.88 | v21.54,106.56 24.57,106.56 24.77,106.35 25.19,106.35 25.4,106.56 v30.2,106.56
32KHZ  (via drill 0.3)
  Top 0.15: R2-PINH1.1 91.21,60.85 91.21,60.71 88.64,58.15 88.64,57.88 U3.1 88.57,57.8 88.57,57.53 v87.47,56.42 | v81.86,56.42 75,49.56 31.1,49.56 18.22,36.68 18.22,36.48 U2.9
  Bottom 0.15: v87.47,56.42 v81.86,56.42
DN  (via drill 0.3)
  Top 0.15: J2.A7 163.57,54.62 163.02,54.62 162.81,54.41 162.81,53.93 163.02,53.72 163.57,53.72 J2.B7 163.64,53.65 v164.54,53.65 | v154.22,50.6 152.01,48.39 D1.1
  Bottom 0.15: v154.22,50.6 161.49,50.6 v164.54,53.65
DP  (via drill 0.3)
  Top 0.15: 164.4,54.41 164.19,54.2 163.64,54.2 J2.A6 | 164.4,54.41 164.4,54.9 164.19,55.1 163.64,55.1 J2.B6 | v152.91,45.89 152.42,46.38 152.01,46.38 D1.3 | v164.54,54.34 164.47,54.41 164.4,54.41
  Bottom 0.15: v152.91,45.89 155.88,45.89 160.32,50.33 161.82,50.33 165.03,53.53 165.03,53.86 v164.54,54.34
EPD_3V3  (via drill 0.3)
  Top 0.3: J1.16 86.77,15.84 87.19,15.84 J1.15 87.23,16.73 89.15,18.65 EPD_C5.2 89.36,19.37 v89.96,19.37 | Q2.2 80.61,23.87 83.8,23.87 84.7,24.77 C7.1 | C7.1 84.9,24.77 86.7,22.97 90.44,22.97 TP17.TP 90.62,22.75 v90.62,21.51 | L1.2 85.87,26.71 85.87,25.88 84.9,24.91 C7.1
  Bottom 0.3: v89.96,19.37 89.96,19.72 89.82,19.86 89.82,20.71 v90.62,21.51
EPD_3V3_C  (via drill 0.3)
  Top 0.3: R_CL1.1 79.16,25.46 80.33,25.46 80.54,25.67 Q2.1 80.68,25.81 80.68,26.71 83.38,29.41 88.71,29.41 88.92,29.62 88.92,33.98 80.75,42.16 79.09,42.16 TP13.TP 78.95,42.22 v77.98,43.19 | v24.03,50.33 20.78,53.58 20.78,53.93 U2.18
  Bottom 0.3: v24.03,50.33 24.66,50.33 28.33,46.66 74.52,46.66 v77.98,43.19
EPD_BUSY  (via drill 0.3)
  Top 0.15: v86.77,11.75 90.17,15.15 90.17,15.84 J1.9 | v68.84,11.75 61.43,4.34 TP9.TP | v19.53,44.72 10.6,53.65 10.6,53.93 U2.26
  Bottom 0.15: v68.84,11.75 71.5,11.75 | 71.5,11.75 v86.77,11.75 | v19.53,44.72 40.72,44.72 41.07,44.37 41.07,42.85 40.79,42.57 40.79,42.17 48.37,34.59 48.39,34.59 69.85,13.14 70.15,13.14 71.5,11.79 71.5,11.75
EPD_CS  (via drill 0.3)
  Top 0.15: J1.12 88.71,15.84 88.71,15.36 86.08,12.72 78.19,12.72 76.73,14.18 76.73,17.29 76.66,17.36 76.66,19.44 v78.46,21.24 78.6,21.38 79.3,21.38 D6.2 | v78.12,24.7 78.05,24.7 77.36,25.4 R9.1 | v23.76,33.15 20.78,36.13 20.78,36.41 U2.11 | v72.85,35.02 72.45,35.02 72.35,35.12 72.35,36.12 72.56,36.33 73.16,36.33 TP10.TP 74.03,35.72 72.78,36.96 70.64,36.96 62.26,28.58 53.88,28.58 v53.84,28.54
  Bottom 0.15: v78.46,21.24 78.12,21.59 v78.12,24.7 78.12,29.76 v72.85,35.02 | v23.76,33.15 35.93,33.15 40.61,28.47 40.97,28.47 41.04,28.54 v53.84,28.54
EPD_DC  (via drill 0.3)
  Top 0.15: v85.04,11.27 89.2,15.42 89.2,15.84 J1.11 | v62.33,2.61 61.36,1.64 TP11.TP | v16.83,32.46 13.16,36.13 13.16,36.41 U2.5
  Bottom 0.15: v85.04,11.27 70.98,11.27 v62.33,2.61 52.84,2.61 22.99,32.46 v16.83,32.46
EPD_RST  (via drill 0.3)
  Top 0.15: v88.99,14.59 89.68,15.29 89.68,15.84 J1.10 | TP12.TP 62.11,8.03 68.68,14.59 v69.11,14.59 69.02,14.69 68.98,14.71 v68.98,30.59 | v20.29,50.33 16.97,53.65 16.97,53.93 U2.21
  Bottom 0.15: v69.11,14.59 69.71,14.59 70.21,14.09 88.49,14.09 v88.99,14.59 | v20.29,50.33 23.41,50.33 27.5,46.24 53.33,46.24 v68.98,30.59
FLASH_CS  (via drill 0.3)
  Top 0.15: 39.48,40.42 40.45,40.42 D9.2 40.52,40.49 41.28,41.25 v41.28,42.43 | 39.48,40.42 38.78,40.42 R5.1 | v41.69,45.76 41.69,46.38 40.93,47.14 40.93,47.42 U1.1 | 39.48,40.42 39.48,36.75 38.16,35.44 22.79,35.44 22.02,36.2 22.02,36.41 U2.12
  Bottom 0.15: v41.69,45.76 41.69,42.85 v41.28,42.43
GDR
  Top 0.15: Q3.1 72.35,14.9 73.08,15.63 73.75,15.63 74.58,14.79 75.94,14.79 R4.2 76.18,14.59 76.18,19.58 78.74,22.14 89.19,22.14 90.3,21.02 90.3,20.78 90.93,20.15 93.08,20.15 93.16,20.06 94.45,20.06 94.56,19.94 94.56,18.38 93.73,17.54 J1.2
GND  (via drill 0.3)
  Top 0.15: U2.29_1 12.54,42.5 12.54,43.68 U2.29_2 12.61,43.68 13.71,43.68 U2.29_5 | U2.29_1 12.61,42.5 13.71,42.5 U2.29_4 13.78,42.5 14.96,42.5 U2.29_7 15.03,42.5 15.03,43.68 U2.29_8 15.03,43.75 15.03,44.92 U2.29_9 14.96,44.99 13.78,44.99 U2.29_6 13.71,44.99 12.54,44.99 U2.29_3 12.54,45.06 12.54,47.69 8.11,52.13 8.11,53.93 U2.28 8.11,54 8.11,77.96 15.58,85.44 J4.G1 15.65,85.51 15.65,86.54 16.48,87.38 16.48,90.28 15.65,91.12 J4.G2 15.65,91.18 15.65,92.22 16.48,93.05 16.48,98.11 16.28,98.32 D8.1 16.06,98.51 15.84,99.01 15.58,99.01 | v8.11,38.07 8.11,36.48 U2.1 | v11.84,41.81 12.47,42.43 U2.29_1 | 42.18,29.21 D11.1 44.12,29.83 46.19,29.83 D10.1 | 41.76,43.68 42.87,43.68 44.74,45.55 U1.9 | 41.76,43.68 40.93,43.68 U1.4 | 41.76,43.68 41.76,40.49 40.52,39.25 40.52,39.04 D9.1 40.45,38.97 40.03,38.55 v40.03,38.14 | v40.03,35.99 40.03,30.61 D12.1 40.17,30.03 41.35,30.03 42.18,29.21 | v67.11,108.98 67.81,108.98 C10.2 | v67.04,107.8 66.07,107.8 66,107.87 | 62.1,107.11 65.17,107.11 65.93,107.87 | 56.85,96.1 53.72,99.23 52.62,99.23 52.08,99.77 C_DELAY.2 52.08,99.84 50.21,99.84 49.66,99.29 47.92,99.29 IC1.3 47.86,99.29 36.85,99.29 27.93,108.2 C6.2 27.34,108.56 26.59,108.56 25.97,107.94 | 56.85,96.1 56.86,96.09 56.86,76.92 TP4.TP | J4.P6 4.99,92.78 4.85,92.78 2.43,95.2 2.43,95.55 J4.G4 | J4.G3 1.39,82.46 1.39,89.84 4.04,92.5 J4.P6 | 15.58,99.01 12.4,99.01 C9.2 | 15.58,99.01 15.56,99.04 22.98,106.46 | 25.83,107.87 24.39,107.87 22.98,106.46 | J4.P6 5.06,92.78 6.37,92.78 9.35,95.75 9.35,100.33 17.11,108.08 21.18,108.08 21.39,107.87 21.39,107.29 21.51,107.17 22.17,107.17 22.44,106.9 22.44,106.7 22.34,106.6 22.48,106.46 22.98,106.46
  Top 0.15: 156.89,51.09 153.53,51.09 150.97,48.53 148.61,48.53 C5_USB.2 | 163.64,57.74 J2.A12 | 163.64,57.8 J2.A12 | J2.MP1 168.14,49.36 168.14,59.47 J2.MP2 167.82,59.53 167.42,59.14 164.84,59.14 | 164.84,59.14 164.58,59.14 | 120.5,32.39 121.19,32.39 121.74,32.94 124.93,32.94 IC4.2 125,33.01 125.41,33.43 125.48,33.43 133.03,40.98 133.03,45.69 132.48,46.24 132.2,46.24 | 120.5,32.39 119.67,32.39 R1_PWRUSB.1 | 129.79,46.31 127.49,46.31 126.45,45.27 126.25,45.27 R2_BAT.1 | 132.2,46.24 MCP73831.2 | J2.B12 163.64,51.36 163.64,51.09 J2.A1 163.64,51.02 163.64,49.84 164.13,49.36 J2.MP3 163.57,49.84 162.35,49.84 v162.15,50.04 | U4.4 140.79,48.11 141.13,48.11 141.76,48.73 U4.9 | U4.9 141.83,48.73 141.97,48.59 142.66,48.59 U4.6 142.8,48.53 143.07,48.53 146.88,44.72 152.35,44.72 | U4.9 141.76,48.87 141.13,49.5 140.79,49.5 U4.1 140.72,49.5 134.9,49.5 C2_BAT.2 134.83,49.43 132.91,49.43 129.79,46.31 | 152.35,44.72 153.67,44.72 R2-USB1.1 | v154.57,42.43 154.92,42.78 154.92,43.19 R2-USB.2 | 152.35,44.72 152.35,44.66 v153.05,43.95 | v156.37,45.76 154.78,47.35 D1.5 154.5,47.42 154.78,47.42 156.16,48.8 156.16,49.22 C4_USB.2 156.23,49.29 156.86,49.92 157.36,49.92 157.54,50.1 157.54,50.43 156.89,51.09 | C1.2 156.72,5.17 155.61,5.17 C2.2 155.61,5.24 154.92,5.94 154.92,7.25 | SENSOR2.7 157.13,9.54 157.13,9.33 157.62,8.85 158.17,8.85 158.66,9.33 158.66,9.54 SENSOR2.5 158.79,9.61 165.37,16.19 165.37,17.78 J3.1 | SENSOR2.1 156.37,12.45 156.37,11.34 157.06,10.65 157.06,9.61 SENSOR2.7 | 154.92,7.25 156.51,8.85 156.58,8.85 157.06,9.33 SENSOR2.7 | C3.- 131.65,30.87 131.37,30.59 122.71,30.59 121.95,29.83 121.74,29.83 C1_BAT1.2 121.68,29.76 120.53,29.76
  Top 0.15: C1_BAT2.2 136.08,33.15 133.93,33.15 131.72,30.94 C3.- | C3.- 131.37,30.52 135.39,26.5 135.39,15.91 TP5.TP 135.46,15.84 144.04,7.25 154.92,7.25 | J1.17 86.22,15.84 86.22,15.42 84.14,13.35 81.79,13.35 J1.MP2 81.72,13.35 78.67,13.35 77.49,14.52 R4.1 77.42,14.66 77.42,17.02 76.94,17.5 76.94,18.61 77.56,19.23 EPD_C12.1 77.63,19.3 78.67,19.3 EPD_C11.1 78.74,19.37 80.75,21.38 D6.1 80.82,21.38 82.69,21.38 83,21.06 EPD_C10.1 83.49,20.76 84.6,20.76 84.69,20.85 | 90.38,19.58 89.4,20.56 EPD_C5.1 89.11,20.83 88.12,20.83 EPD_C6.1 88,20.83 87.01,20.83 EPD_C7.1 86.95,20.83 85.81,20.83 EPD_C8.1 84.69,20.85 | 90.38,19.58 90.72,19.23 90.72,15.91 J1.8 | EPD_C2.1 EPD_C1.1 94.38,20.34 94.56,20.34 94.84,20.06 94.84,19.36 | C7.2 86.08,24.77 90.03,24.77 90.65,24.15 90.92,24.15 91.66,23.41 91.66,21.55 EPD_C2.1 | v91,20.69 92.32,20.69 EPD_C2.1 | C1_BAT.2 122.71,47.21 95.08,47.21 94.18,48.11 C10_SUPERCAP.2 94.11,48.18 94.01,48.29 93.41,48.29 C8.2 91.6,48.38 91.6,46.09 | 91.6,46.09 91.6,29.82 D3.1 91.83,29.55 91.41,29.14 v90.86,29.14 | U3.13 84.83,48.53 84.83,47.69 86.84,45.69 91.2,45.69 91.6,46.09 | 120.53,29.76 120.5,29.76 v120.5,29.83 | 120.53,29.76 109.59,18.82 95.38,18.82 94.84,19.36 | v120.5,32.25 120.5,32.39 | 42.18,29.21 v43.29,28.1 | v70.02,12.65 70.5,12.65 70.98,12.17 R2.1 71.05,12.17 71.05,10.3 SJ1.1 71.05,10.23 71.05,10.02 71.82,9.26 77.15,9.26 78.39,10.51 92.31,10.51 95.15,13.35 J1.MP1 95.11,13.34 94.58,13.87 94.58,18 94.84,18.26 94.84,19.36 | 129.79,46.31 132.13,46.31 132.2,46.24 | 62.1,107.11 56.85,101.85 56.85,96.1 | J2.A12 162.11,57.77 156.89,52.54 156.89,51.09
  Top 0.15: J2.A12 163.61,59.16 163.99,59.53 J2.MP4 164.45,59.53 164.84,59.14 | 62.1,107.11 61.62,107.11 61.4,107.33 61.4,108.1 61.29,108.22 60.25,108.22 59.63,108.84 52.63,108.84 C5.2 52.56,108.84 51.8,108.84 50.9,107.94 50.76,107.94 RESET_BUTTON.2 | 90.38,19.58 v90.38,20.06 | EPD_C9.1 84.69,20.85
  Top 0.3: J2.A12 J2.B1
  Bottom 0.15: v8.11,38.07 v11.84,41.81 36.29,41.81 39.96,38.14 v40.03,38.14 v40.03,35.99 | v67.11,108.98 67.31,108.78 67.31,108.07 v67.04,107.8 | v153.05,43.95 v154.57,42.43 154.57,42.76 156.72,44.92 | 156.72,44.92 161.85,50.04 v162.15,50.04 | v156.37,45.76 156.37,45.06 156.51,44.92 156.72,44.92 | v90.38,20.06 v91,20.69 91,21.28 91.05,21.33 91.05,24.55 91.14,24.63 91.14,28.86 v90.86,29.14 | v120.5,29.83 v120.5,32.25 | v43.29,28.1 54.5,28.1 69.73,12.86 69.81,12.86 v70.02,12.65
  pour Top: 96.81,10.14 96.82,10.12 96.82,0.08 170.27,0.08 170.27,67.12 92.33,67.12 92.3,67.14 92.28,67.16 92.27,67.18 92.27,111.12 69.42,111.12 69.42,110.18 69.41,110.16 69.39,110.14 69.36,110.12 19.63,110.12 19.6,110.14 19.58,110.16 19.57,110.18 19.57,111.12 0.23,111.12 0.22,111.13 0.22,54.38 6.56,54.38 6.59,54.36 6.61,54.34 6.62,54.32 6.62,36.38 6.61,36.36 6.59,36.34 6.56,36.32 0.12,36.32 0.12,0.18 78.47,0.18 78.47,10.12 78.48,10.14 78.5,10.16 78.53,10.18 96.76,10.18 96.79,10.16
  pour Bottom: 96.81,10.14 96.82,10.12 96.82,0.12 170.27,0.08 170.27,67.12 92.33,67.12 92.3,67.14 92.28,67.16 92.27,67.18 92.27,111.12 69.42,111.12 69.42,110.18 69.41,110.16 69.39,110.14 69.36,110.12 19.63,110.12 19.6,110.14 19.58,110.16 19.57,110.18 19.57,111.12 0.22,111.12 0.22,54.38 6.56,54.38 6.59,54.36 6.61,54.34 6.62,54.32 6.62,36.38 6.61,36.36 6.59,36.34 6.56,36.32 0.08,36.32 0.08,0.2 0.15,0.18 78.47,0.13 78.47,10.12 78.48,10.14 78.5,10.16 78.53,10.18 96.76,10.18 96.79,10.16
GPIO8
  Top 0.15: R1.1 19.53,33.24 19.53,36.41 U2.10
I2C_PW  (via drill 0.3)
  Top 0.15: R2-PINH.2 159.14,6.49 158.03,6.49 R1-PINH.2 157.96,6.49 156.78,6.49 C1.1 156.72,6.49 155.61,6.49 C2.1 155.68,6.56 v155.68,7.39 | 155.82,13.07 155.82,11.48 156.3,10.99 156.3,9.61 SENSOR2.8 | 155.82,13.07 156.02,13.28 156.58,13.28 157.06,12.79 157.06,12.52 SENSOR2.2 157.13,12.45 157.13,11.82 157.89,11.06 157.89,9.61 SENSOR2.6 | v25.42,50.33 22.02,53.72 22.02,53.93 U2.17 | v155.68,13.14 155.75,13.07 155.82,13.07
  Bottom 0.15: v25.42,50.33 84.07,50.33 121.76,12.64 155.18,12.64 v155.68,13.14 v155.68,7.39
INT_RTC
  Top 0.15: R1-PINH1.1 87.74,60.78 87.74,60.28 86.08,58.62 86.08,57.88 U3.3 86.01,57.8 86.01,57.53 74.1,45.62 51.8,45.62 TP15.TP 51.73,45.55 48.34,45.55 47.99,45.2 47.99,44.58 36.08,32.67 18.98,32.67 16.97,34.68 16.97,36.41 U2.8
IO/BOOT  (via drill 0.3)
  Top 0.15: 22.37,109.4 21.75,108.77 20.78,108.77 R_BOOT.1 | v23.48,108.36 22.44,109.4 22.37,109.4 | C6.1 27.1,107.32 26.87,107.32 26.66,107.11 25.02,107.11 24.88,106.96 | 24.88,106.96 24.59,106.67 24.59,53.98 U2.15 | 24.88,106.96 v24.98,106.86 | 22.37,109.4 BOOT_BUTTON.4
  Bottom 0.15: v23.48,108.36 v24.98,106.86
IO/CHANGE
  Top 0.15: 62.4,109.4 62.33,109.33 | 62.33,109.33 61.91,108.91 60.83,108.91 R_CHANGE.1 | U2.23 14.41,53.93 14.41,53.65 18.22,49.84 31.58,49.84 67.87,86.13 67.87,107.53 C10.1 67.87,107.6 66.84,108.62 63.17,108.62 62.47,109.33 62.4,109.33 CHANGE_BUTTON.4 62.33,109.33
MISO  (via drill 0.3)
  Top 0.15: TP6.TP 1.53,98.87 3.53,96.86 3.53,95.2 4.85,93.88 5.2,93.88 J4.P7 5.27,93.81 5.68,93.81 v6.24,93.26 | R8.1 40.03,26.55 40.03,28.04 D12.2 40.54,28.9 v40.79,28.9 | v40.58,44.23 41.14,44.23 41.62,44.72 41.62,45.2 40.93,45.89 40.93,46.17 U1.2 | v18.77,44.23 9.35,53.65 9.35,53.93 U2.27 9.28,54 9.28,54.2 8.66,54.83 v8.66,55.03
  Bottom 0.15: v18.77,44.23 v40.58,44.23 40.58,42.78 40.52,42.71 40.52,29.34 40.79,29.07 v40.79,28.9 | v6.24,93.26 6.24,57.46 v8.66,55.03
MOSI  (via drill 0.3)
  Top 0.15: v87.81,16.6 87.74,16.53 87.74,15.91 J1.14 | v61.29,35.02 60.6,35.02 60.04,35.58 TP7.TP | 44.12,27.47 44.12,28.3 D11.2 44.19,28.37 44.95,29.14 46.77,29.14 48.62,30.99 48.62,35.02 | 44.12,27.47 44.12,26.33 R7.1 | 48.62,35.02 48.62,43.61 U1.5 | v16.48,35.3 15.72,36.06 15.72,36.41 U2.7 | v44.05,27.47 44.12,27.47 | v4.23,56.91 4.23,88.41 5.2,89.38 J4.P3 | v48.55,35.02 48.62,35.02
  Bottom 0.15: v87.81,16.6 82.34,16.6 63.92,35.02 v61.29,35.02 v48.55,35.02 | v44.05,27.47 28.81,27.47 20.99,35.3 v16.48,35.3 10.25,35.3 7.62,37.93 7.62,53.72 4.44,56.91 v4.23,56.91
N$1
  Top 0.15: R2-USB1.2 154.92,44.65 154.92,44.37 154.22,43.68 154.22,42.71 154.11,42.6 150.44,42.6 150.34,42.5 150.34,38.69 150.97,38.07 156.85,38.07 165.44,46.66 165.44,51.92 164.19,53.17 163.64,53.17 J2.A5
N$4
  Top 0.15: R2-USB.1 153.6,43.19 150.62,43.19 150.07,42.64 150.07,38.55 150.83,37.79 156.99,37.79 165.72,46.52 165.72,54.62 164.19,56.14 163.64,56.14 J2.B5
N$6  (via drill 0.3)
  Top 0.15: v123.75,30.11 123.48,29.83 123.06,29.83 C1_BAT1.1 | IC4.1 124.93,33.91 122.92,33.91 122.23,33.22 120.29,33.22 120.01,32.94 119.11,32.94 118.97,32.81 118.97,31.91 119.11,31.77 121.88,31.77 D2.1 121.88,31.84 123.75,31.84 124.03,31.56 v124.1,31.56 124.52,31.56 124.93,31.97 IC4.3 125,31.97 125.62,32.6 125.62,32.88 134.46,41.71 137.95,41.71 Q1.2
  Bottom 0.15: v123.75,30.11 123.75,31.21 v124.1,31.56
N$7
  Top 0.15: R2_BAT.2 127.56,45.27 129.5,45.27 129.57,45.34 MCP73831.5
N$8
  Top 0.15: EPD_C2.2 92.41,16.36 92.23,16.18 J1.5
N$9
  Top 0.15: J1.4 92.8,15.91 92.8,18.4 EPD_C1.2
N$10
  Top 0.15: CHG_LED.C 126.18,47.14 126.18,46.31 125.62,45.76 125.62,44.3 129.43,40.49 R1_BAT.1
N$11
  Top 0.15: R1_BAT.2 129.5,41.81 129.5,42.71 132.13,45.34 MCP73831.1
N$12
  Top 0.15: J1.24 82.69,15.91 79.64,15.91 77.63,17.92 EPD_C12.2
N$13
  Top 0.15: IC1.5 50.7,101.16 52.08,101.16 C_DELAY.1
N$15
  Top 0.15: EPD_C10.2 83.73,19.23 83.73,15.91 J1.22
N$16
  Top 0.15: 95.36,29.55 94.94,29.97 94.94,27.9 95.29,27.55 95.29,25.95 D4.1 | 95.36,29.55 96.26,28.65 97.44,28.65 C4.1 | 95.36,29.55 D3.2
N$18
  Top 0.15: J1.20 84.77,15.91 84.77,18.54 85.77,19.54 EPD_C8.2
N$19
  Top 0.15: J1.19 85.25,15.91 85.25,17.85 86.94,19.54 EPD_C7.2
N$20
  Top 0.15: J1.18 85.73,15.91 85.73,17.23 87.33,18.82 87.63,18.82 88.12,19.31 EPD_C6.2
N$25
  Top 0.15: D7.1 87.4,62.44 88.02,62.44 89.27,63.69 90.24,63.69 92.38,61.55 92.38,52.27 89.13,49.01 89.13,46.93 88.64,46.45 R_CAPACITOR.1
PREVGH  (via drill 0.3)
  Top 0.15: 84.28,18.68 84.28,15.91 J1.21 | v84.21,32.18 D5.1 | v84.21,18.68 84.28,18.68 | 84.28,18.68 84.28,19.17 EPD_C9.2
  Bottom 0.15: v84.21,18.68 v84.21,32.18
PREVGL  (via drill 0.3)
  Top 0.15: 83.17,16.25 83.17,15.91 J1.23 | 83.17,16.25 81.44,17.99 78.74,17.99 EPD_C11.2 | 83.17,16.25 83.24,16.19 v83.24,17.09 | v90.65,24.77 91.76,25.88 D4.2
  Bottom 0.15: v90.65,24.77 90.65,24.5 v83.24,17.09
RESE
  Top 0.15: J1.3 93.21,15.84 93.21,15.42 88.57,10.79 74.86,10.79 74.45,11.2 R3.2 74.38,11.27 73.48,12.17 73.48,14.87 Q3.2
RESE'
  Top 0.15: R3.1 74.38,9.95 72.85,9.95 72.58,10.23 SJ1.2 72.51,10.3 72.37,10.44 72.37,12.17 R2.2
RESET  (via drill 0.3)
  Top 0.15: v48.41,108.36 47.37,109.4 47.3,109.4 | 47.3,109.4 46.82,108.91 45.78,108.91 R_RESET.1 | v51.94,108.22 52.56,107.6 C5.1 | v9.14,50.05 9.14,41.81 10.53,40.42 10.53,36.48 U2.3 | IC1.1 47.89,105.92 v47.92,105.95 | 47.3,109.4 RESET_BUTTON.4
  Bottom 0.15: 47.92,106.28 47.92,108.17 48.11,108.36 v48.41,108.36 48.48,108.36 48.62,108.22 v51.94,108.22 | v9.14,50.05 9.14,67.5 47.92,106.28 | 47.92,106.28 v47.92,105.95
RTC_RST  (via drill 0.3)
  Top 0.15: v24.1,55.1 23.34,54.34 23.34,54 U2.16 | v82.34,55.1 84.77,57.53 84.77,57.8 U3.4
  Bottom 0.15: v82.34,55.1 v24.1,55.1
RX
  Top 0.15: U2.24 13.16,54 13.16,57.32 13.58,57.74 TP2.TP
SCK  (via drill 0.3)
  Top 0.15: v87.81,15.08 88.23,15.49 J1.13 | v63.85,34.47 62.88,35.44 TP8.TP 62.81,35.44 62.33,35.44 61.08,34.19 50.15,34.19 49.35,34.99 | R6.1 46.12,24.94 46.12,24.98 46.82,25.67 46.82,27.54 46.48,27.88 D10.2 | U1.6 48.69,44.65 49.35,43.98 49.35,34.99 | v17.66,32.94 14.41,36.2 14.41,36.41 U2.6 14.34,36.48 14.34,37.45 10.67,41.12 v10.67,41.32 | D10.2 44.8,26.99 v44.67,26.99 | v4.09,91.25 4.44,91.6 5.2,91.6 J4.P5 | 49.35,34.99 49.35,34.98 49.28,34.91 49.28,31.26 46.34,28.33 D10.2
  Bottom 0.15: v87.81,15.08 83.24,15.08 v63.85,34.47 | v17.66,32.94 22.93,32.94 28.88,26.99 v44.67,26.99 | v4.09,91.25 4.09,57.67 8.66,53.1 8.66,43.33 v10.67,41.32
SCL  (via drill 0.3)
  Top 0.15: v147.02,45.2 143.21,49.01 142.73,49.01 U4.7 | v147.02,39.18 165.37,20.83 J3.4 165.44,20.76 165.72,20.76 166.27,20.2 166.27,12.45 162.5,8.67 | 162.5,8.67 159.21,5.38 159.21,5.17 R2-PINH.1 | v159.83,11.34 158.72,12.45 SENSOR2.4 | v162.46,8.71 162.5,8.67 | v20.64,51.3 18.22,53.72 18.22,53.93 U2.20 | v86.15,51.3 88.57,48.87 88.57,48.59 U3.16
  Bottom 0.15: v147.02,39.18 v147.02,45.2 95.85,45.2 89.75,51.3 v86.15,51.3 v20.64,51.3 | v162.46,8.71 v159.83,11.34
SDA  (via drill 0.3)
  Top 0.15: v157.96,4.41 157.96,5.11 R1-PINH.1 | v157.96,11.61 157.96,12.45 SENSOR2.3 | v147.64,45.2 143.35,49.5 142.73,49.5 U4.8 | v147.64,37.24 165.09,19.79 165.37,19.79 J3.3 164.66,19.99 164.53,19.87 164.53,19.57 v164.33,19.37 | v22.37,50.81 19.53,53.65 19.53,53.93 U2.19 | v85.39,50.81 87.26,48.94 87.26,48.59 U3.15
  Bottom 0.15: v157.96,4.41 v157.96,11.61 157.96,13 v164.33,19.37 | v147.64,37.24 147.64,38.69 | 147.64,38.69 v147.64,45.2 | v22.37,50.81 v85.39,50.81 89.82,50.81 101.94,38.69 147.64,38.69
SRC  (via drill 0.3)
  Top 0.15: v88.37,33.01 88.2,33.01 87.71,33.51 D5.2 87.71,33.72 85.95,31.96 L1.1 85.87,31.28 82.06,31.28 72.78,22 72.78,17.02 Q3.3 | C4.2 v95.72,27.34
  Bottom 0.15: v88.37,33.01 94.05,27.34 v95.72,27.34
SS_SD
  Top 0.15: D8.2 14.68,98.39 11.84,98.39 10.92,99.31 10.76,99.31 R10.1 10.53,98.94 10.53,92.66 6.28,88.41 5.68,88.41 J4.P2 5.61,88.28 6.93,86.96 6.93,52.89 9.63,50.19 9.63,41.74 11.84,39.52 11.84,36.48 U2.4
TX
  Top 0.15: U2.25 11.84,54 11.84,57.32 11.36,57.8 TP1.TP
USB_D+  (via drill 0.3)
  Top 0.15: v153.46,47.14 154.15,46.45 154.43,46.45 D1.4 | v29.5,42.29 29.9,41.89 29.9,41.39 26.15,37.64 U2.14
  Bottom 0.15: v153.46,47.14 153.46,47.69 153.95,48.18 153.95,48.46 150.14,52.27 20.99,52.27 18.29,49.56 18.29,44.09 20.09,42.29 v29.5,42.29
USB_D-  (via drill 0.3)
  Top 0.15: v153.46,48.32 154.43,48.32 D1.6 | v77.84,51.78 77.63,51.78 74.31,48.46 35.04,48.46 23.34,36.75 23.34,36.48 U2.13
  Bottom 0.15: v153.46,48.32 93.14,48.32 89.68,51.78 v77.84,51.78
VBAT
  Top 0.15: MCP73831.3 132.2,47.28 133.03,48.11 134.83,48.11 C2_BAT.1 134.9,48.11 136.63,48.11 137.6,47.14 TP3.TP | U4.2 140.79,49.01 140.79,48.59 U4.3 140.72,48.53 139.2,48.53 137.74,47.07 TP3.TP | Q1.3 137.67,44.51 137.67,47.07 TP3.TP
VBUS
  Top 0.3: R1_PWRUSB.2 119.67,33.71 121.54,33.71 121.81,33.98 D2.2 121.95,34.12 121.95,45.06 123.96,47.07 C1_BAT.1 124.1,47.21 125.07,47.21 125.76,47.9 127.01,47.9 127.63,47.28 CHG_LED.A 127.77,47.21 129.57,47.21 MCP73831.4 132.84,50.52 144.14,50.52 | D1.2 151.94,47.35 151.77,47.18 C5_USB.1 145.23,50.52 144.14,50.52 | C4_USB.1 156.16,50.47 154.85,50.47 152.91,48.53 152.91,47.9 152.42,47.42 152.08,47.42 D1.2 | D1.2 152.49,47.28 152.91,46.86 152.91,46.66 153.74,45.83 155.01,45.83 155.66,45.17 155.66,40.76 PFMF.050.1.2 | 144.14,50.52 147.01,53.39 TP14.TP
VRTC  (via drill 0.3)
  Top 0.15: C10_SUPERCAP.1 94.11,50.33 93.49,49.7 91.62,49.7 C8.1 91.55,49.63 v90.38,49.63 | 87.26,47 87.26,46.45 R_CAPACITOR.2 | 87.26,47 86.08,48.18 86.08,48.53 U3.14 | v87.88,47.14 87.47,47.14 87.33,47 87.26,47
  Bottom 0.15: v87.88,47.14 v90.38,49.63
VUSB
  Top 0.3: J2.A4 163.64,51.92 163.64,52.13 J2.B9 163.5,52.2 | 163.5,52.2 162.95,52.2 162.39,52.75 162.39,56.07 162.99,56.67 J2.B4 J2.A9 | PFMF.050.1.1 151.38,40.56 153.46,38.48 156.72,38.48 156.86,38.63 156.86,43.89 156.09,44.65 156.09,44.95 156.3,45.15 156.48,45.15 156.92,45.6 156.92,45.8 162.92,51.8 163.1,51.8 163.5,52.2